# EAGLE board Smashing Snicket-Jaiks (EAGLE 9.7.0)

Size 189.66 x 195.42 mm. Coordinates in mm from the lower left corner, seen from the top.
Outline: 0,0 189.66,0 189.66,195.42 0,195.42 0,0
Copper layers (1*16): Top 0.035mm / dielectric 1.5mm / Bottom 0.035mm
Design rules "default": minimum track width 6mil, minimum drill 0.35mm, track to track 6mil, track to pad 6mil, pad to pad 6mil, via to via 6mil, smd to smd 6mil, copper to edge 40mil, drill to drill 6mil, minimum pad ring 10mil, minimum via ring 8mil, stop-mask expansion 4mil, vias tented up to drill 0mil, thermal gap 10mil

## Footprints (pad centres in the part's own frame; a part is rotated, then mirrored left to right if it is on the bottom)
1X02 = drill 1.016 long: 1 -1.27,0; 2 1.27,0
MOTOR = drill 1.118 pad 3.15 octagon: + 2.54,0; - -2.54,0
BATTERY-GENERIC = drill 1.118 pad 3.15 octagon: + 2.54,0; - -2.54,0
RESAD1016W63L850D250B = drill 0.83 pad 1.43: 1 -5.08,0; 2 5.08,0
SWITCH-SPDT-PTH-8.5X3.7MM = drill 1.016 pad 1.88: 1 -2.54,0; 2 0,0; 3 2.54,0

## Placement (x,y rotation side)
L1  LIGHTBULB  [1X02]  144.86,68.69 0 top
L2  LIGHTBULB  [1X02]  180.42,69.02 0 top
M1  MOTOR_HDR  [MOTOR]  167.15,187.17 0 top
M2  MOTOR_HDR  [MOTOR]  69.76,8.26 0 top
P1  BATTERYGENERIC  [BATTERY-GENERIC]  8.26,35.45 180 top
R1  220  [RESAD1016W63L850D250B]  106.64,61.36 90 top
S1  TOGGLE  [SWITCH-SPDT-PTH-8.5X3.7MM]  117.07,94.47 0 top
S2  TOGGLE  [SWITCH-SPDT-PTH-8.5X3.7MM]  182.67,175.12 270 top

## Library data of the parts
L1 L2 M1 M2 P1 R1 S1 S2 = Tinkercad

## Nets
M1_+: M1.+ S2.2
M2_+: L1.2 L2.2 M2.+
P1+: P1.+ R1.1
P1-: M2.- P1.-
S1_O: L2.1 S1.1
S1_P: R1.2 S1.2
S1_S: L1.1 S1.3

## Tracks (layer width: path | path; a pad name or v marks a point on that pad's centre or on a via)
M1_+  (1 unrouted)
M2_+  (2 unrouted)
P1+  (1 unrouted)
P1-  (1 unrouted)
S1_O  (1 unrouted)
S1_P  (1 unrouted)
S1_S  (1 unrouted)